# Altium PCB PCB3.PcbDoc
Units mm, origin at the board's own origin, x right, y up, seen from the top; angles counter-clockwise.
Board outline 30 x 27 mm, 2 copper layers (Top Layer, Bottom Layer); 12 components, 12 nets, 45 pads, 11 vias.
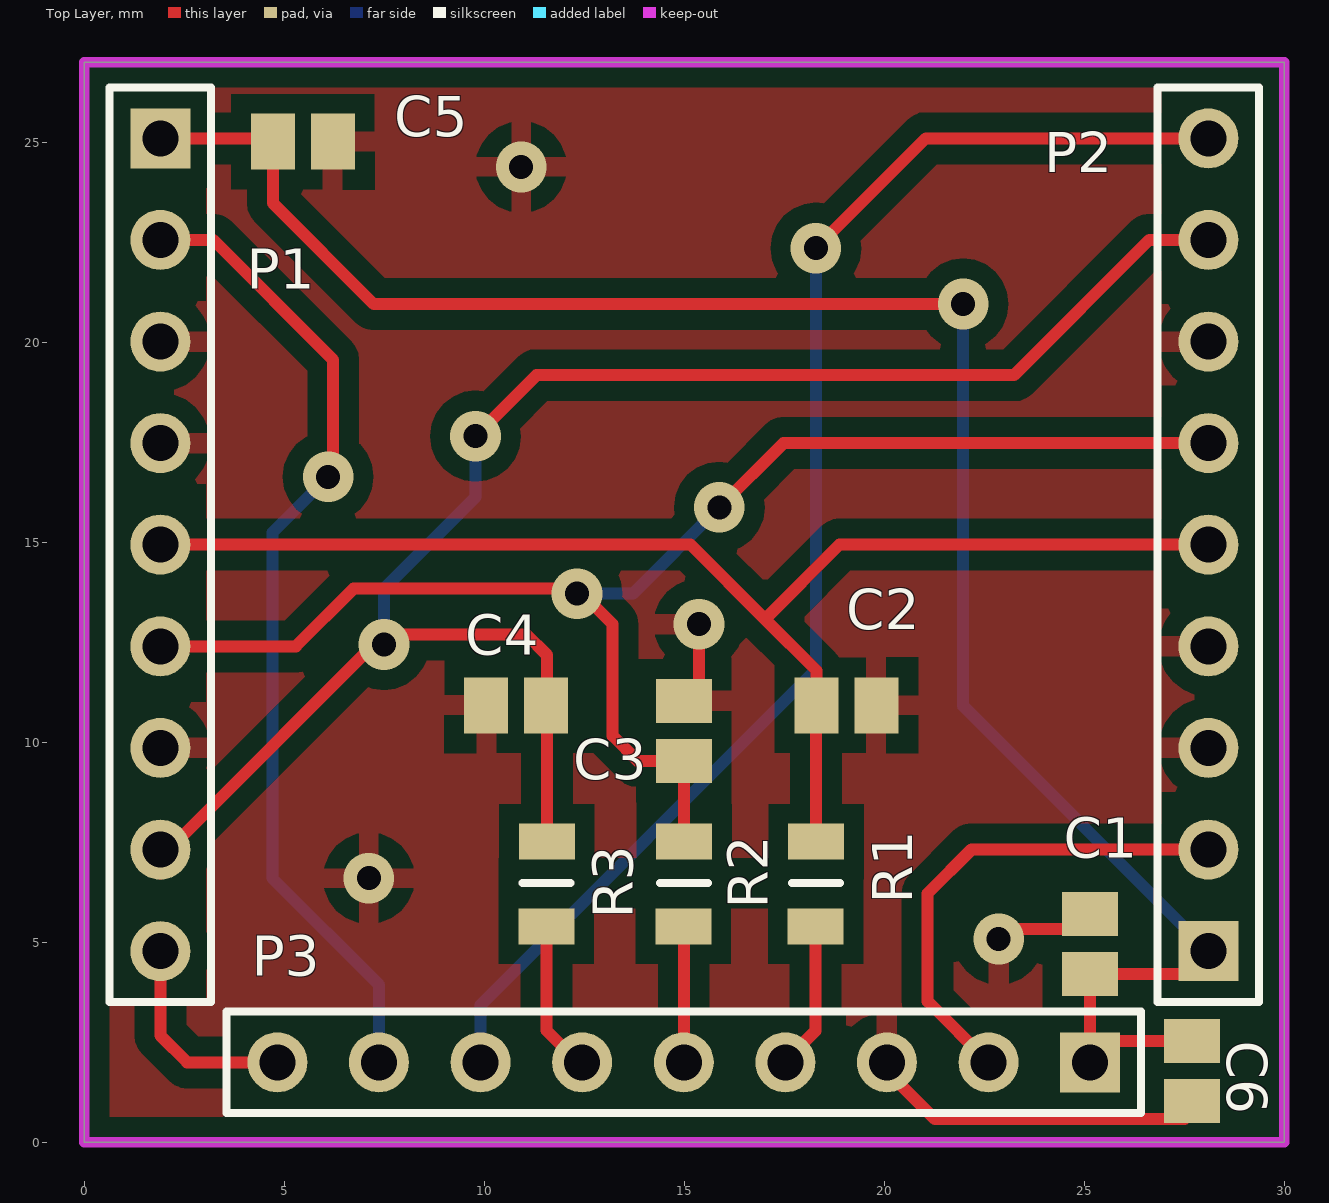
[diagram p0: Top Layer view]
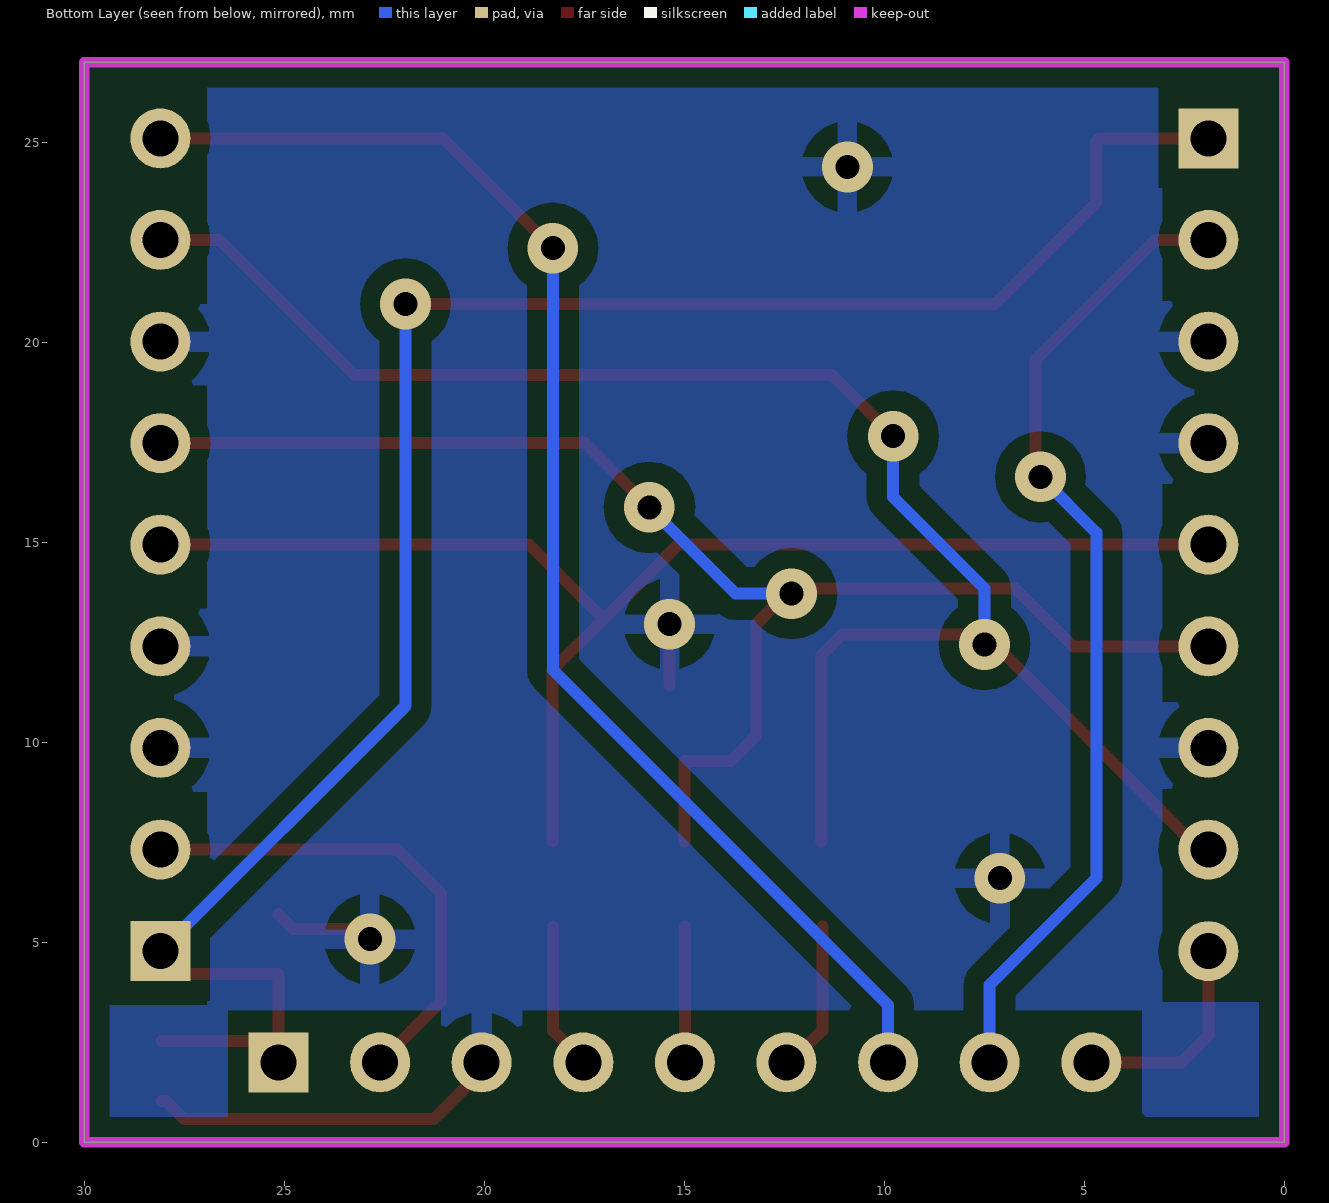
[diagram p1: Bottom Layer view, seen from below]

## Layer stack, top to bottom
Top Solder: solder mask 0.0102, Solder Resist, Dk 3.5
Top Layer: signal copper 0.0356
Dielectric 1: dielectric 0.32, FR-4, Dk 4.8
Bottom Layer: signal copper 0.0356
Bottom Solder: solder mask 0.0102, Solder Resist, Dk 3.5

## Board outline
0,0 0,27 30,27 30,0

## Design rules (kind name [scope] priority, off if disabled: settings)
AssemblyTestPointUsage [All] p1 off:
AssemblyTestpoint [All] p1 off: testpointundercomponent=TRUE minsize=1.016 maxsize=2.54 preferedsize=1.524 minholesize=0 maxholesize=1.016 preferedholesize=0.813 testpointgrid=0.025 usegrid=TRUE gridtolerance=0 allowsidetop=TRUE allowsidebottom=TRUE
Clearance [All] p1: gap=0.3
ComponentClearance [All] p1 off: gap=0.254 collisioncheckmode=3 verticalgap=0.254 showdistances=FALSE
DiffPairsRouting [All] p1 off: maxlimit=0.254 minlimit=0.254 mostfreqgap=0.254 toplayer_minwidth=0.381 toplayer_maxwidth=0.381 toplayer_prefwidth=0.381 bottomlayer_minwidth=0.381 bottomlayer_maxwidth=0.381 bottomlayer_prefwidth=0.381 maxuncoupledlength=12.7
FabricationTestPointUsage [All] p1 off: valid=0 allowmultiple=FALSE
FabricationTestpoint [All] p1 off: side=3 testpointundercomponent=TRUE minsize=1.016 maxsize=2.54 preferedsize=1.524 minholesize=0 maxholesize=1.016 preferedholesize=0.813 testpointgrid=0.025 allowsidetop=TRUE allowsidebottom=TRUE usegrid=TRUE gridtolerance=0
FanoutControl Fanout_BGA [IsBGA] p1 off: bgadir=Out bgaviamode=Centered fanoutstyle=Auto fanoutdirection=Alternating viagrid=0.025 // Fanout_BGA (Default Rule)
FanoutControl Fanout_LCC [IsLCC] p2 off: bgadir=Out bgaviamode=Centered fanoutstyle=Auto fanoutdirection=Alternating viagrid=0.025 // Fanout_LCC (Default Rule)
FanoutControl Fanout_SOIC [IsSOIC] p3 off: bgadir=Out bgaviamode=Centered fanoutstyle=Auto fanoutdirection=Alternating viagrid=0.025 // Fanout_SOIC (Default Rule)
FanoutControl Fanout_Small [(CompPinCount < 5)] p4 off: bgadir=Out bgaviamode=Centered fanoutstyle=Auto fanoutdirection=OutThenIn viagrid=0.025 // Fanout_Small (Default Rule)
FanoutControl Fanout_Default [All] p5 off: bgadir=Out bgaviamode=Centered fanoutstyle=Auto fanoutdirection=Alternating viagrid=0.025 // Fanout_Default (Default Rule)
Height [All] p1 off: minheight=0 maxheight=25.4 prefheight=12.7
HoleSize [All] p1 off: absolutevalues=TRUE maxlimit=2.54 minlimit=0.025 maxpercent=80.000 minpercent=20.000
HoleToHoleClearance [All] p1 off: gap=0.254 allowstackedmicrovias=TRUE
LayerPairs [All] p1 off: enforce=TRUE
MinimumSolderMaskSliver [All] p1 off: minsoldermaskwidth=0.254
NetAntennae [All] p1 off: netantennaetolerance=0
PlaneConnect [All] p1: planeconnectstyle=Relief reliefexpansion=0.5 reliefentries=4 reliefconductorwidth=0.5 reliefairgap=0.5
PolygonConnect [All] p1: connectstyle=Relief reliefconductorwidth=0.5 reliefentries=4 polygonreliefangle="90 Angle" airgapwidth=0.5
RoutingCorners [All] p1 off: cornerstyle=45-Degree minsetback=2.54 maxsetback=2.54
RoutingLayers [All] p1 off: top layer_v5=TRUE bottom layer_v5=TRUE
RoutingPriority [All] p1 off: routingpriority=0
RoutingTopology [All] p1 off: topology=Shortest
RoutingVias [All] p1 off: holewidth=0.6 width=1.5 viastyle="Through Hole" minholewidth=0.6 minwidth=1.27 maxholewidth=0.9 maxwidth=1.6
SilkToBoardRegionClearance [All] p1 off:
SilkToSilkClearance [All] p1 off: silktosilkclearance=0.1
SilkToSolderMaskClearance [IsPad] p1 off: minsilkscreentomaskgap=0.1 clearancetoexposedcopper=TRUE
SolderMaskExpansion [All] p1: expansion=0.102
Width [All] p1 off: maxlimit=0.5 minlimit=0.3 preferedwidth=0.3
4 further rules are at their usual default settings.

## Components (designator, comment, footprint, x,y, rotation, side; value= is the part's Value field where it differs from the comment)
C1 "Cap" C0805 25.146,4.953 r270 top
C2 "Cap" C0805 19.05,10.922 r180 top
C3 "Cap" C0805 14.986,10.287 r90 top
C4 "Cap" C0805 10.795,10.922 r180 top
C5 "Cap" C0805 5.461,25.019 r180 top
C6 "Cap" C0805 27.686,1.778 r90 top
P1 "Header 9" HDR1X9 1.9,25.1 r270 top locked
P2 "Header 9" HDR1X9 28.1,4.78 r90 top locked
P3 "Header 9" HDR1X9 25.146,2 r180 top
R1 "Res2" 6-0805_N 18.288,6.477 r270 top
R2 "Res2" 6-0805_N 14.986,6.477 r270 top
R3 "Res2" 6-0805_N 11.557,6.477 r270 top

## Footprints (in the part's own frame and the unit in brackets; to place one, negate y for a bottom-side part, rotate by r counter-clockwise, add the part's x,y. Pads: shape width x height; smd on the part's side, far side on the other; paste and mask are expansions set on the pad)
6-0805_N [mm] "Chip Resistor, Body 2.0x1.2mm, IPC Medium Density"
  rect 0.9x1.4 smd: 1(-1.039,0.009) 2(1.078,-0.007)
  silkscreen extent 0,-0.6 0,0.6, body extent -1.07,-0.7 1.07,0.7, height 0.7
C0805 [mm]
  rect 1.1x1.4 smd: 1(-0.75,0) 2(0.75,0)
  body extent -1.1,-0.72 1.1,0.72, height 1.4
HDR1X9 [mm] "Connector; Header; 9 Position"
  rect 1.5x1.5 hole 0.9: 1(0,0)
  round 1.5 hole 0.9: 2(2.54,0) 3(5.08,0) 4(7.62,0) 5(10.16,0) 6(12.7,0) 7(15.24,0) 8(17.78,0) 9(20.32,0)
  silkscreen extent -1.27,-1.27 21.59,1.27

## Part data
C1 C2 C3 C4 C5 C6: "Capacitor"
P1 P2 P3: "Header, 9-Pin"
R1 R2 R3: "Resistor"

## Via types
v1: diameter 1.27, hole 0.6, Top Layer to Bottom Layer, 11 vias

## Nets (pads, with @x,y where several pads share a name; then routed paths per layer and width w, separated by ;. In a path a pad name is that pad's centre, name@x,y a point inside that pad or via, vN(x,y) a via of type N, cw(c..) or ccw(c..) an arc to the next point about the centre after c; other vN are vias at no path point)
3.3V: C1.2 C5.2 C6.2 P1.1 P2.1 P3.1 | length 48.7
  Top Layer w0.3: P1.1 C5.2@4.63,25.1 ; C5.2 4.711,23.483 7.239,20.955 21.844,20.955 v1@21.907,21.018 ; P3.1 C1.2 P2.1@27.523,4.203 ; P3.1@25.285,2.528 C6.2@28.067,2.528
  Bottom Layer w0.3: v1@21.971,21.018 21.971,10.909 P2.1
  other v1: 21.971,20.955
GND: C1.1 C2.1 C3.2 C4.2 C5.1 C6.1 P1.3 P1.4 P1.7 P2.3 P2.4 P2.7 P3.3 | length 13
  Top Layer w0.3: C3.2@15.367,11.418 v1(15.367,12.954) ; P3.3 20.066,1.778 21.267,0.577 27.501,0.577 27.952,1.028 C6.1@28.067,1.028 ; v1(22.86,5.08) 23.114,5.334 24.777,5.334 C1.1
  other v1: 7.112,6.604 10.922,24.384
MISO: C2.2 P1.5 P2.5 R1.1 | length 33.8
  Top Layer w0.3: P1.5 15.159,14.94 17.018,13.081 ; R1.1 C2.2@18.297,10.919 ; C2.2 18.3,11.799 17.018,13.081 ; P2.5 18.877,14.94 17.018,13.081
MOSI: C3.1 P1.6 P2.6 R2.1 | length 35.9
  Top Layer w0.3: P1.6 5.288,12.4 6.731,13.843 v1@11.811,13.843 ; v1@12.319,13.843 13.208,12.954 13.208,10.16 13.831,9.537 C3.1 ; R2.1 C3.1@14.995,9.528 ; v1(15.875,15.875) 17.48,17.48 P2.6
  Bottom Layer w0.3: v1(12.319,13.716) 13.716,13.716 v1(15.875,15.875)
NetP3_4: P3.4 R1.2 | length 3.7
  Top Layer w0.3: P3.4 17.526,2.032 18.281,2.787 R1.2
NetP3_5: P3.5 R2.2 | length 3.4
  Top Layer w0.3: P3.5 R2.2@14.986,5.392
NetP3_6: P3.6 R3.2 | length 3.8
  Top Layer w0.3: R3.2 11.55,2.801 12.351,2 P3.6
RST1: P2.2 P3.2 | length 12.3
  Top Layer w0.3: P3.2 21.082,3.524 21.082,6.223 22.179,7.32 P2.2
RST2: P1.2 P3.8 | length 24.9
  Top Layer w0.3: P1.2 3.221,22.56 6.223,19.558 6.223,16.764 v1(6.096,16.637)
  Bottom Layer w0.3: v1(6.096,16.637) 4.699,15.24 4.699,6.604 7.366,3.937 P3.8
SCK: C4.1 P1.8 P2.8 R3.1 | length 44
  Top Layer w0.3: P1.8@1.9,6.72 2.419,7.239 2.419,7.626 v1@7.493,12.7 ; v1(7.493,12.446) v1@7.493,12.7 ; v1(9.779,17.653) 11.303,19.177 23.241,19.177 26.624,22.56 P2.8 ; R3.1 11.566,12.183 11.049,12.7 v1@7.493,12.7
  Bottom Layer w0.3: v1(7.493,12.446) 7.493,13.843 9.779,16.129 v1(9.779,17.653)
SS1: P2.9 P3.7 | length 34.8
  Top Layer w0.3: v1(18.288,22.352) 21.036,25.1 P2.9
  Bottom Layer w0.3: P3.7 9.906,3.429 18.288,11.811 v1(18.288,22.352)
SS2: P1.9 P3.9 | length 5.3
  Top Layer w0.3: P1.9 1.9,2.672 2.572,2 P3.9

## Polygon pours and split planes (outlines as drawn)
GND on Bottom Layer "Bottom Layer-No Net" (solid, pour order 10): 0,27 30,27 30,0 0,0
GND on Top Layer "Bottom Layer-No Net" (solid, pour order 12): 0,27 30,27 30,0.282 29.845,0.127 29.972,0 30,0 0,0

## Keep-outs
Keep-Out Layer:
  the board outline again, w0.254

## Other copper
Top Layer:
  pour cut-out: 10.35,7.112 19.481,7.112 19.481,5.842 10.35,5.842
Multi-Layer:
  pour cut-out: 26.924,8.763 29.464,8.763 29.464,3.429 26.924,3.429
  pour cut-out: 26.924,18.923 29.464,18.923 29.464,13.335 26.924,13.335
  pour cut-out: 26.924,26.289 29.464,26.289 29.464,20.955 26.924,20.955
  pour cut-out: 0.508,26.365 3.048,26.365 3.048,21.031 0.508,21.031
  pour cut-out: 0.508,16.459 3.048,16.459 3.048,10.998 0.508,10.998
  pour cut-out: 3.556,3.302 19.05,3.302 19.05,0.762 3.556,0.762
  pour cut-out: 21.082,3.302 26.416,3.302 26.416,0.762 21.082,0.762
  pour cut-out: 0.508,8.839 3.048,8.839 3.048,3.505 0.508,3.505